# Altium PCB PCB_Button - Copy.PcbDoc
Units mil, origin at the board's own origin, x right, y up, seen from the top; angles counter-clockwise.
Board outline 820 x 2400 mil, 2 copper layers (Top Layer, Bottom Layer); 28 components, 23 nets, 80 pads, 17 vias.
Unrouted connection lines stored in the file: 10.
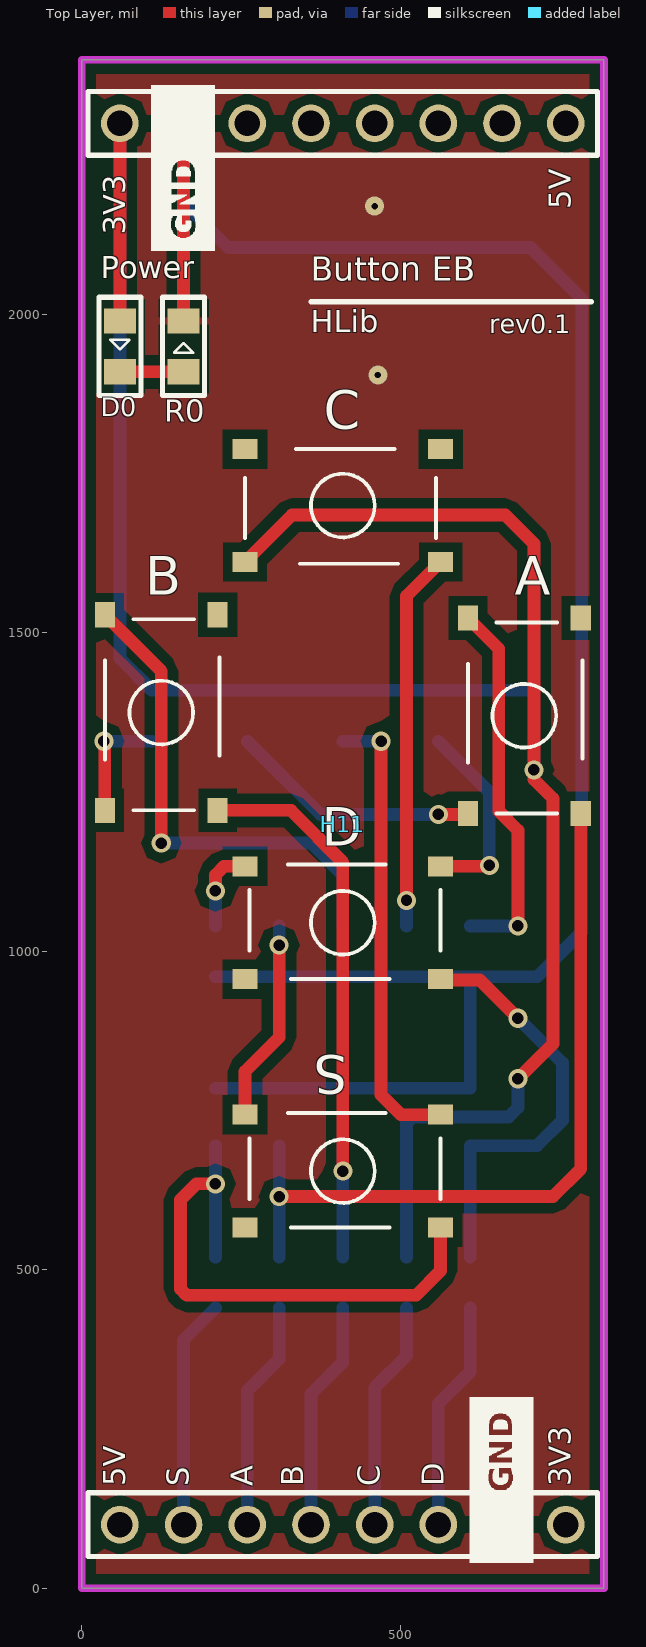
[diagram p0: Top Layer view]
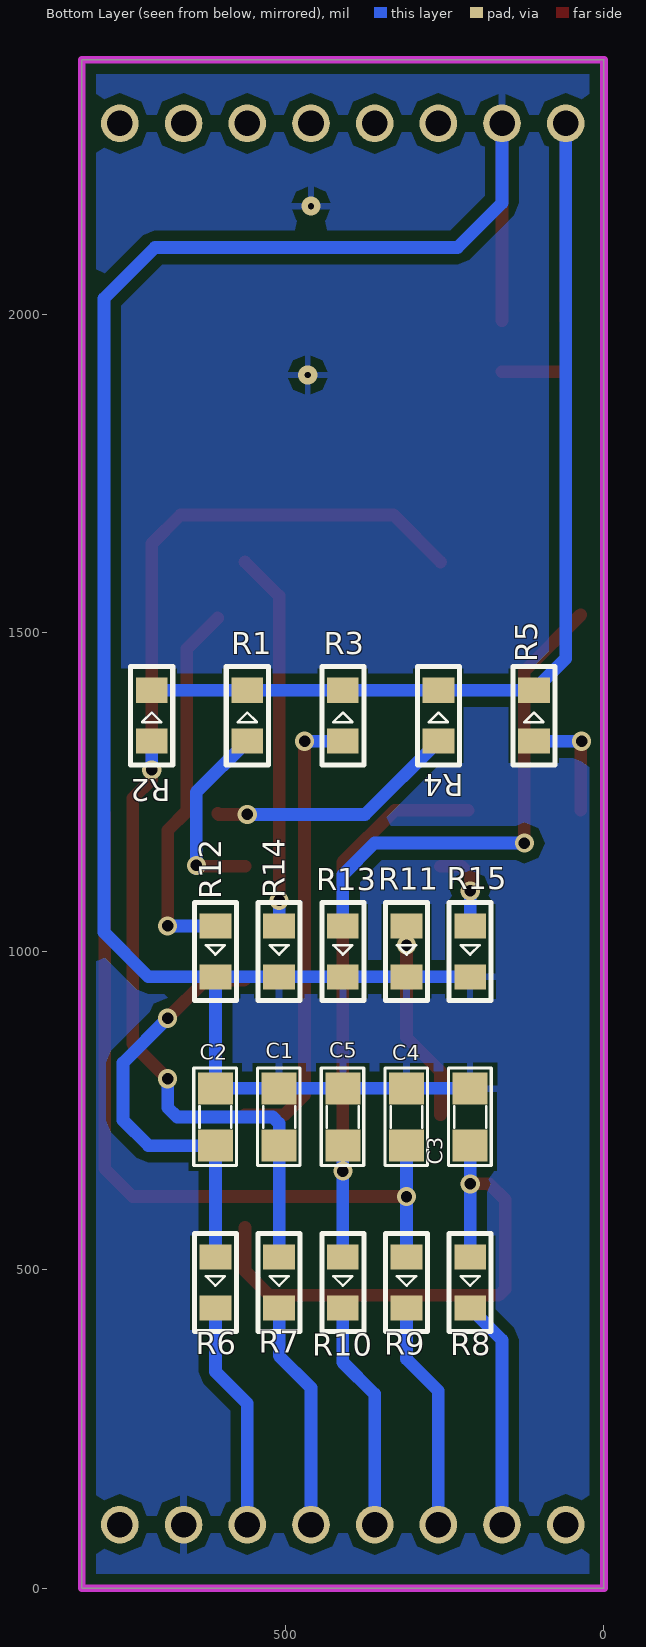
[diagram p1: Bottom Layer view, seen from below]
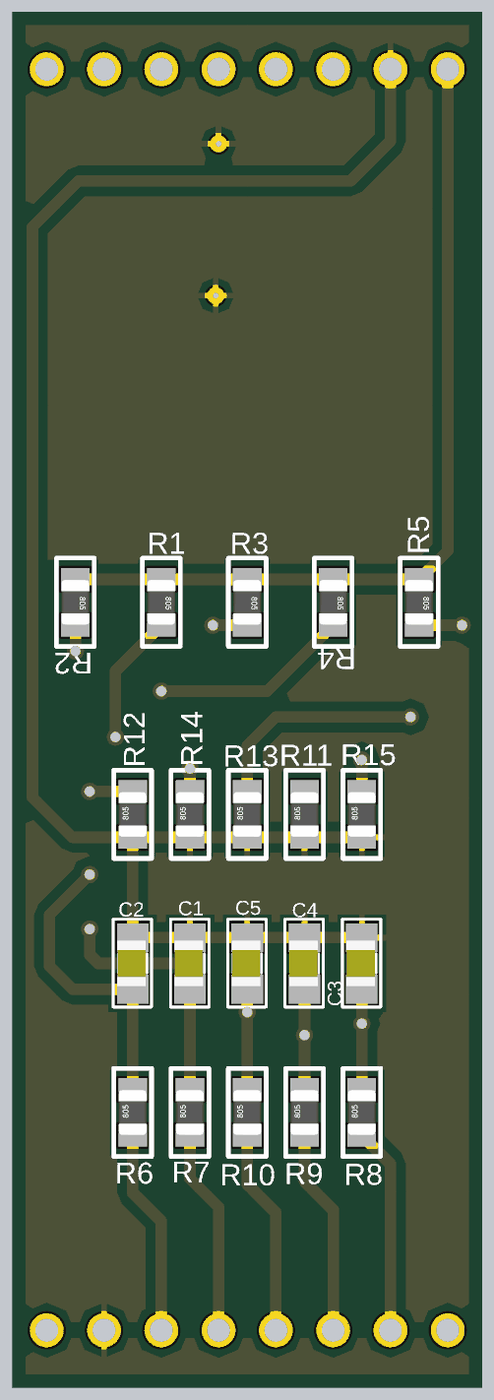
[diagram p2: 3D render of the assembled board from below, using the file's embedded part models]

## Layer stack, top to bottom
Top Layer: signal copper 1.4
Dielectric: dielectric 12.6, FR-4, Dk 4.8
Bottom Layer: signal copper 1.4

## Board outline
0,0 0,2400 820,2400 820,0

## Design rules (kind name [scope] priority, off if disabled: settings)
Clearance [InPolygon] p1: gap=15
Clearance Clearance_1 [All] p2: gap=10
PolygonConnect [All] p1: connectstyle=Relief reliefconductorwidth=10 reliefentries=4 polygonreliefangle="90 Angle"
RoutingVias [All] p1: holewidth=25 width=40 viastyle="Through Hole" minholewidth=28 minwidth=50 maxholewidth=28 maxwidth=50
SilkscreenOverComponentPads SilkToSolderMaskClearance [IsPad] p1: minsilkscreentomaskgap=10
SolderMaskExpansion [All] p1: expansion=4
Width [All] p1: maxlimit=25 minlimit=8 preferedwidth=10
27 further rules are at their usual default settings.

## Components (designator, comment, footprint, x,y, rotation, side; value= is the part's Value field where it differs from the comment)
A "SW" SW4 695,1370 r90 top
B "SW" SW4 125,1375 r90 top
C "SW" SW4 410,1700 r0 top
C1 "0.1u/104" SM-0805 510,740 r270 bottom
C2 "0.1u/104" SM-0805 610,740 r270 bottom
C3 "0.1u/104" SM-0805 210,740 r270 bottom
C4 "0.1u/104" SM-0805 310,740 r270 bottom
C5 "0.1u/104" SM-0805 410,740 r270 bottom
D "SW" SW4 410,1045 r180 top
D0 "Power" SMD0805 60,1950 r270 top
H11 "MBoard1_BH_DualPorts" MBoard1_BH_DualPorts 60,2300 r0 top
R0 "R" SMD0805 160,1950 r90 top
R1 "R" SMD0805 560,1370 r90 bottom
R2 "R" SMD0805 710,1370 r90 bottom
R3 "R" SMD0805 410,1370 r90 bottom
R4 "R" SMD0805 260,1370 r90 bottom
R5 "R" SMD0805 110,1370 r90 bottom
R6 "R" SMD0805 610,480 r270 bottom
R7 "R" SMD0805 510,480 r270 bottom
R8 "R" SMD0805 210,480 r270 bottom
R9 "R" SMD0805 310,480 r270 bottom
R10 "R" SMD0805 410,480 r270 bottom
R11 "R" SMD0805 310,1000 r270 bottom
R12 "R" SMD0805 610,1000 r270 bottom
R13 "R" SMD0805 410,1000 r270 bottom
R14 "R" SMD0805 510,1000 r270 bottom
R15 "R" SMD0805 210,1000 r270 bottom
S "SW" SW4 410,655 r180 top

## Footprints (in the part's own frame and the unit in brackets; to place one, negate y for a bottom-side part, rotate by r counter-clockwise, add the part's x,y. Pads: shape width x height; smd on the part's side, far side on the other; paste and mask are expansions set on the pad)
MBoard1_BH_DualPorts [mm]
  round 1.5 hole 1.02: 1(0,0) 2(2.54,0) 3(5.08,0) 4(7.62,0) 5(10.16,0) 6(12.7,0) 7(15.24,0) 8(17.78,0) 9(17.78,-55.88) 10(15.24,-55.88) 11(12.7,-55.88) 12(10.16,-55.88) 13(7.62,-55.88) 14(5.08,-55.88) 15(2.54,-55.88) 16(0,-55.88)
  silkscreen extent -1.27,-57.15 19.05,1.27, body extent -1.27,-57.15 19.05,1.27, height 8
SM-0805 [mil] "Compoment SMD 80x50mil"
  rect 50x55 smd: 1(-45,0) 2(45,0)
  silkscreen extent -77,-34 76,33, body extent -40,-27 40,23, height 24
SMD0805 [mil] "Chip Resistor; Body 2.0 x 1.3 mm (LxW typ)"
  rect 39.37x50 smd: 1(-40,0) 2(40,0)
  silkscreen extent -77,-33 77,33, body extent -39,-25 39,25, height 31
SW4 [mm] "SW button 4pin, 6x6x3mm"
  rect 1x0.8 smd: 1(-3.9,2.25) 2(3.9,2.25) 3(3.9,-2.25) 4(-3.9,-2.25)
  silkscreen extent -3.9,-2.32 3.72,2.25

## Part data
C1 C2 C3 C4 C5: library part CM, "Cap SMD"
D0: library part LEDSMD, "LED 3mm"
R0 R1 R2 R3 R4 R5 R6 R7 R8 R9 R10 R11 R12 R13 R14 R15: "RES_08"

## Via types
v1: diameter 30, hole 18, Top Layer to Bottom Layer, tented both sides, 15 vias
v2: diameter 30, hole 10, Top Layer to Bottom Layer, 2 vias

## Nets (pads, with @x,y where several pads share a name; then routed paths per layer and width w, separated by ;. In a path a pad name is that pad's centre, name@x,y a point inside that pad or via, vN(x,y) a via of type N, cw(c..) or ccw(c..) an arc to the next point about the centre after c; other vN are vias at no path point)
3V3: D0.1 H11.1 R1.2 R2.2 R3.2 R4.2 R5.2 | length 1820.7
  Top Layer w20: D0.1 H11.1
  Bottom Layer w20: H11.1 60,1460 R5.2 R4.2 R3.2 R1.2 R2.2
GND: C1.1 C2.1 C3.1 C4.1 C5.1 H11.2 H11.10 R0.2 R11.2 R12.2 R13.2 R14.2 R15.2 | length 3296.1
  Top Layer w20: R0.2 H11.2
  Bottom Layer w20: H11.2 160,2175 230,2105 705,2105 785,2025 785,1030 715,960 R12.2 ; C3.1 C4.1 C5.1 C1.1 C2.1 R12.2 ; R15.2 R11.2 R13.2 R14.2 R12.2
  other v2: 465,1905 460,2170
NetA_1: A.1 A.4 C4.2 R4.1 R9.1 | length 1619.2
  Top Layer w20: v1(310,615) 740,615 783.58,658.58 A.4 ; v1(560,1215) 604.96,1215 A.1
  Bottom Layer w20: R4.1 375,1215 v1(560,1215) ; R9.1 v1(310,615) C4.2
NetA_2: A.2 A.3 R12.1 | length 591.1
  Top Layer w20: A.2 655,1474.96 655,1220 685,1190 v1(685,1040)
  Bottom Layer w20: R12.1 v1(685,1040)
NetB_1: B.1 B.4 C5.2 R5.1 R10.1 | length 1074.3
  Top Layer w20: v1(35,1330) 36.42,1328.58 B.1 ; B.4 328.54,1221.46 410,1140 v1(410,655)
  Bottom Layer w20: v1(35,1330) R5.1 ; R10.1 C5.2
NetB_2: B.2 B.3 R13.1 | length 780.9
  Top Layer w20: B.2 125,1439.96 v1(125,1170)
  Bottom Layer w20: v1(125,1170) 360,1170 410,1120 R13.1
NetC1_2: C1.2 C.1 C.4 R2.1 R7.1 | length 1863.2
  Top Layer w20: C.4 330.04,1685 665,1685 710,1640 v1(710,1285) 710,1270 740,1240 740,855 v1(685,800)
  Bottom Layer w20: R7.1 C1.2 510,730 520,740 670,740 685,755 v1(685,800) ; v1(710,1285) R2.1
NetC2_2: C2.2 D.1 D.4 R1.1 R6.1 | length 982.6
  Top Layer w20: D.1 564.96,955 625,955 v1(685,895) ; D.4 638.58,1133.58 v1(640,1135)
  Bottom Layer w20: R1.1 640,1250 v1(640,1135) v1@640,1130 ; R6.1 C2.2 715,695 755,735 755,825 v1(685,895)
NetC3_2: C3.2 R3.1 R8.1 S.1 S.4 | length 1603.4
  Top Layer w20: v1@215,635 v1(210,635) 180,635 155,610 155,470 165,460 525,460 563.54,498.54 S.1 ; v1(470,1330) 470,775 501.42,743.58 S.4
  Bottom Layer w20: R8.1 v1(210,635) C3.2 ; R3.1 v1(470,1330)
NetC_2: C.2 C.3 R14.1 | length 593.6
  Top Layer w20: v1(510,1080) 510,1557.87 C.3
  Bottom Layer w20: R14.1 v1(510,1080)
NetD0_2: D0.2 R0.1 | length 100
  Top Layer w20: D0.2 R0.1
NetD_2: D.2 D.3 R15.1 | length 132.1
  Top Layer w20: v1(210,1095) 210,1120 223.58,1133.58 D.3
  Bottom Layer w20: R15.1 v1(210,1095)
NetH11_3: H11.3
NetH11_4: H11.4
NetH11_5: H11.5
NetH11_6: H11.6
NetH11_7: H11.7
NetH11_11: H11.11 R6.2 | length 360.7
  Bottom Layer w20: H11.11 560,290 610,340 R6.2
NetH11_12: H11.12 R7.2 | length 360.7
  Bottom Layer w20: H11.12 460,315 510,365 R7.2
NetH11_13: H11.13 R10.2 | length 360.7
  Bottom Layer w20: H11.13 360,305 410,355 R10.2
NetH11_14: H11.14 R9.2 | length 360.7
  Bottom Layer w20: H11.14 260,310 310,360 R9.2
NetH11_15: H11.15 R8.2 | length 360.7
  Bottom Layer w20: H11.15 160,390 R8.2
NetR11_1: R11.1 S.2 S.3 | length 318.6
  Top Layer w20: S.3 256.46,811.46 310,865 v1(310,1010)
  Bottom Layer w20: v1(310,1010) R11.1
pads on no net: H11.8 H11.9 H11.16

## Polygon pours and split planes (outlines as drawn)
GND on Top Layer "Bottom Layer-No Net" (solid, remove dead copper, pour order 2): 0,2400 0,0 820,0 820,2400
GND on Bottom Layer "Bottom Layer-No Net" (solid, remove dead copper, pour order 4): 0,2400 0,0 820,0 820,2400

## Keep-outs
Keep-Out Layer:
  the board outline again, w12

## Silkscreen, mask and mechanical layers (free items; w line width, h text height)
Top Overlay:
  drawing of 607 lines, arcs and shapes, not listed
  text "5V" at 780,2165 h60 r90
  text "3V3" at 80,2125 h60 r90
  text "Power" at 30,2045 h60
  text "Button EB" at 360,2040 h65
  text "HLib" at 360,1960 h60
  text "rev0.1" at 640,1960 h50
  text "5V" at 80,160 h60 r90
  text "S" at 180,160 h60 r90
  text "A" at 280,160 h60 r90
  text "B" at 360,160 h60 r90
  text "C" at 480,160 h60 r90
  text "D" at 580,160 h60 r90
  text "3V3" at 780,160 h60 r90
Drill Drawing:
  text ".LEGEND" at 5060,-1300 h60
  text "Drill Drawing." at 5060,-1400 h60

## Dimensions
0,0 to 0,2400 on Mechanical 1
0,0 to 820,0 on Mechanical 1